# Altium PCB HearingAid.PcbDoc
Units mm, origin at the board's own origin, x right, y up, seen from the top; angles counter-clockwise.
Board outline 82.5 x 84.75 mm, 2 copper layers (Top Layer, Bottom Layer); 38 components, 20 nets, 96 pads, 2 vias.
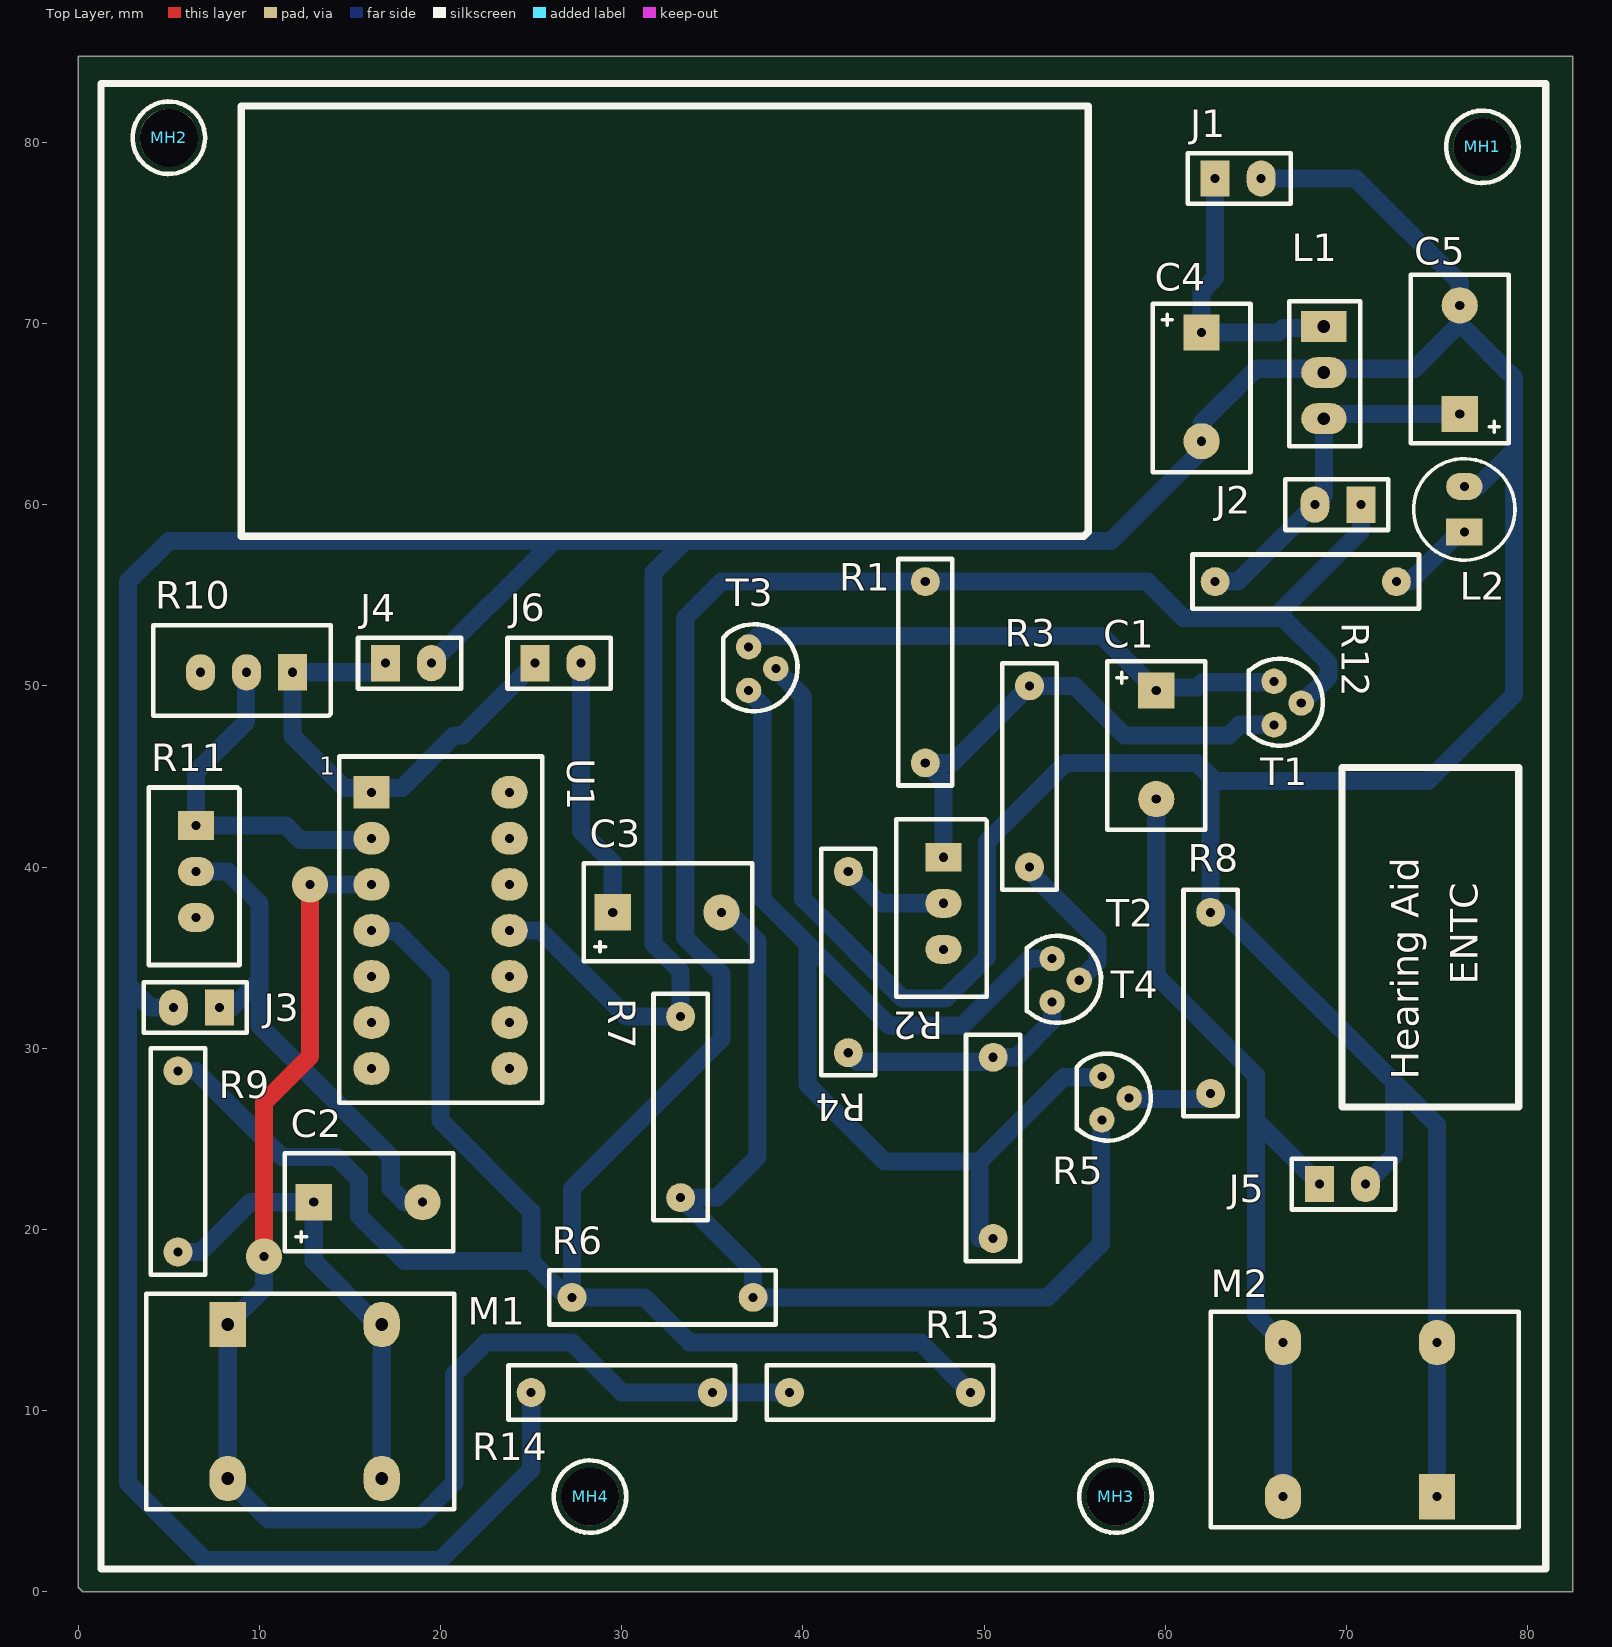
[diagram p0: Top Layer view]
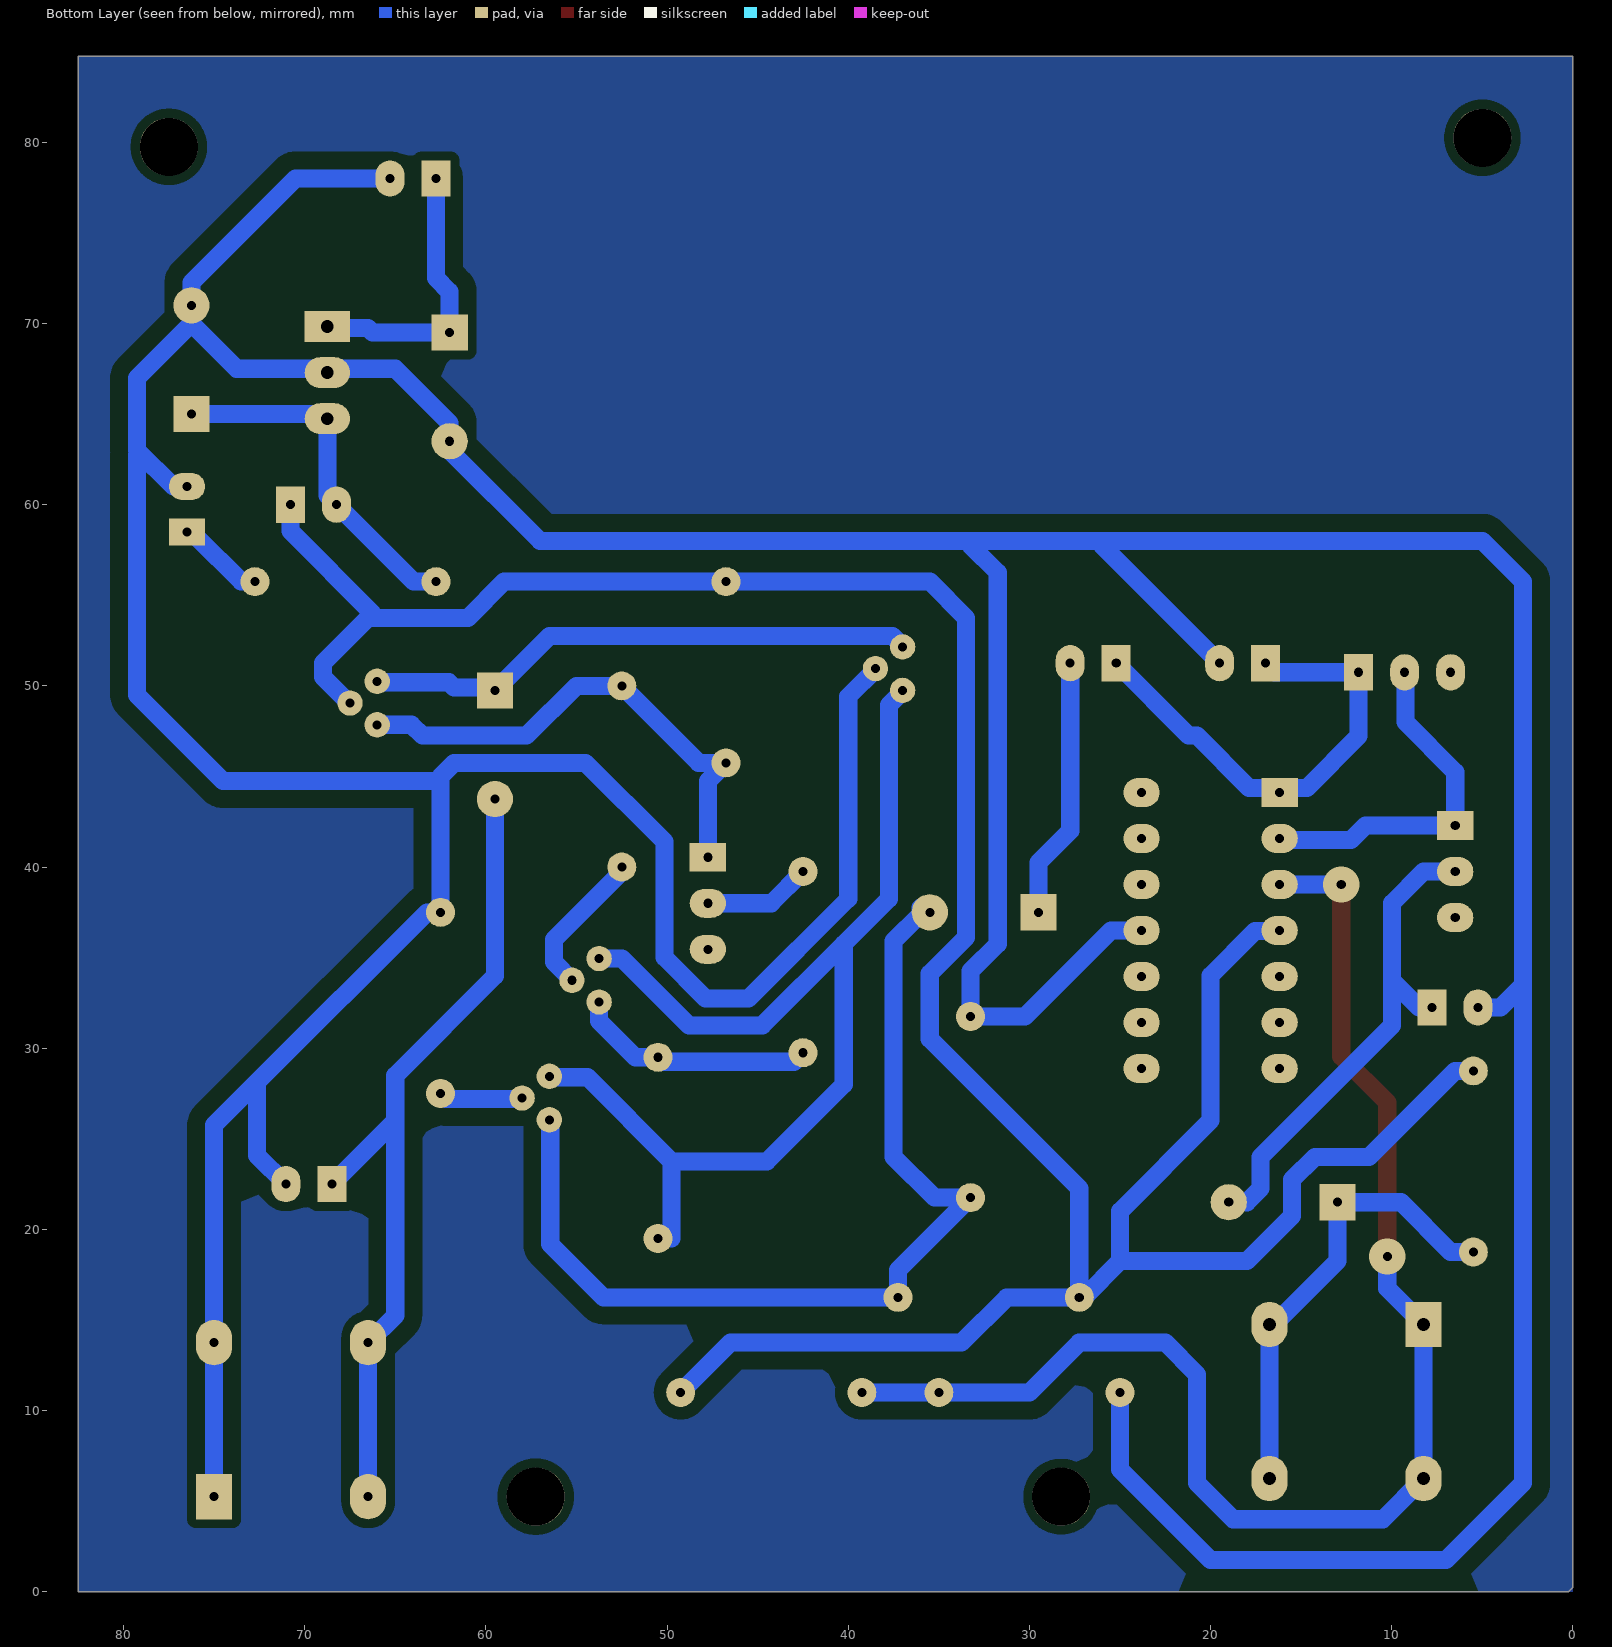
[diagram p1: Bottom Layer view, seen from below]
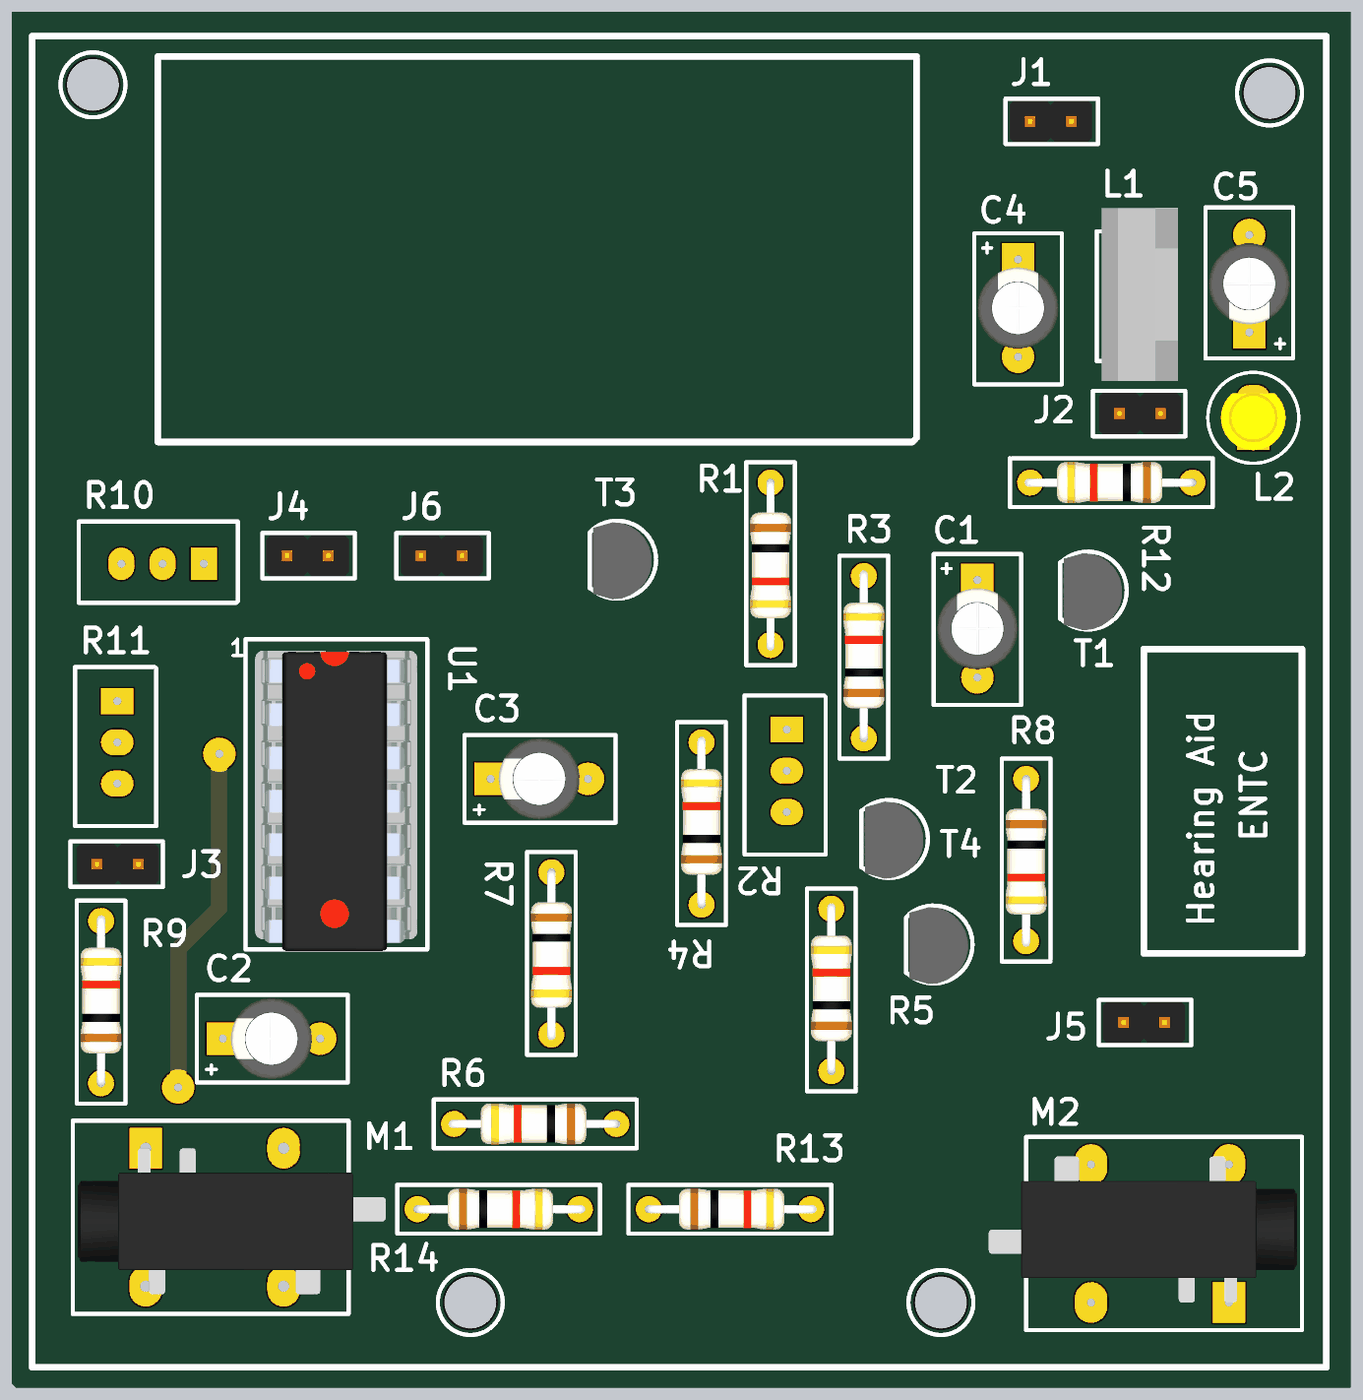
[diagram p2: 3D render of the assembled board from above, using the file's embedded part models]

## Layer stack, top to bottom
Top Solder: solder mask 0.0102, Solder Resist, Dk 3.5
Top Layer: signal copper 0.0356
Dielectric 1: dielectric 0.32, FR-4, Dk 4.8
Bottom Layer: signal copper 0.0356
Bottom Solder: solder mask 0.0102, Solder Resist, Dk 3.5

## Board outline
0,0.25 0.25,0 82.5,0 82.5,84.75 0,84.75

## Design rules (kind name [scope] priority, off if disabled: settings)
Clearance [All] p1: gap=0.5 ignorepadtopadclearanceinfootprint=FALSE except(1: Arc-Fill Arc-Poly Arc-Region Track-Fill Track-Poly Track-Region)
Height [All] p1: minheight=0 maxheight=50 prefheight=50
HoleSize [All] p1: absolutevalues=TRUE maxlimit=3.2 minlimit=0.025 maxpercent=80.000 minpercent=20.000
PlaneClearance [All] p1: clearance=1
PlaneConnect [All] p1: planeconnectstyle=Relief reliefexpansion=0.8 reliefentries=4 reliefconductorwidth=1 reliefairgap=1
PolygonConnect [All] p1: connectstyle=Relief reliefconductorwidth=1 reliefentries=4 polygonreliefangle="90 Angle" airgapwidth=1
RoutingVias [All] p1: holewidth=0.711 width=1.27 viastyle="Through Hole" minholewidth=0.711 minwidth=1.27 maxholewidth=0.711 maxwidth=1.27
ShortCircuit [All] p1 off: allowed=FALSE
SolderMaskExpansion [All] p1: expansion=0.102
Width [All] p1: maxlimit=1 minlimit=0.6 preferedwidth=0.6
25 further rules are at their usual default settings.

## Components (designator, comment, footprint, x,y, rotation, side; value= is the part's Value field where it differs from the comment)
C1 "POLYESTER_CAP_33uF" POLYESTER_CAP2 59.5,49.75 r0 top
C2 "POLYESTER_CAP_33uF" POLYESTER_CAP2 13,21.5 r90 top
C3 "0.33uF MYLAR_CAP" POLYESTER_CAP2 29.5,37.5 r90 top
C4 "0.33uF_MYLAR_CAP" POLYESTER_CAP2 62,69.5 r0 top
C5 "0.33uF_MYLAR_CAP" POLYESTER_CAP2 76.25,65 r180 top
J1 "9V_BATTERY" HEADER_MALE_2_POS 62.75,78 r90 top
J2 "5V_JUMPER" HEADER_MALE_2_POS 70.79,60 r270 top
J3 "MIC_TEST" HEADER_MALE_2_POS 7.79,32.25 r270 top
J4 "PRE_AMP_TEST" HEADER_MALE_2_POS 16.96,51.25 r90 top
J5 "POWER_AMP_TEST" HEADER_MALE_2_POS 68.5,22.5 r90 top
J6 "PRE_AMP_OUT" HEADER_MALE_2_POS 25.21,51.25 r90 top
L1 "LM7805" LM7805 68.75,69.83 r0 top
L2 "LED" LED_3MM 76.5,58.5 r0 top
M1 "CONDENSOR_MIC" CONDENSOR_MIC 8.25,14.75 r270 top
M2 "SPEAKER" SPEAKER 75,5.25 r90 top
MH1 "MOUNTING_HOLE_3mm_NON_PLATED" MOUNTING_HOLE_3MM_NONPLATED 77.5,79.75 r0 top
MH2 "MOUNTING_HOLE_3mm_NON_PLATED" MOUNTING_HOLE_3mm_NONPLATED 5,80.25 r0 top
MH3 "MOUNTING_HOLE_3mm_NON_PLATED" MOUNTING_HOLE_3mm_NONPLATED 57.25,5.25 r0 top
MH4 "MOUNTING_HOLE_3mm_NON_PLATED" MOUNTING_HOLE_3mm_NONPLATED 28.25,5.25 r0 top
R1 "1k" AXIAL_RES 46.75,50.75 r90 top
R2 "Var_Res_10K" TRIMMER_10K 47.75,40.54 r0 top
R3 "15k" AXIAL_RES 52.5,45 r270 top
R4 "2.2k" AXIAL_RES 42.5,34.75 r270 top
R5 "4.7k" AXIAL_RES 50.5,24.5 r270 top
R6 "22k" AXIAL_RES 32.25,16.25 r0 top
R7 "15k" AXIAL_RES 33.25,26.75 r90 top
R8 "1k" AXIAL_RES 62.5,32.5 r90 top
R9 "2.2k" AXIAL_RES 5.5,23.75 r270 top
R10 "Var_Res_100K" TRIMMER_10K 11.83,50.75 r270 top
R11 "Var_Res_100K" TRIMMER_10K 6.5,42.29 r0 top
R12 "330" AXIAL_RES 67.75,55.75 r0 top
R13 "1k" Axial_Res 44.25,11 r180 top
R14 "1k" Axial_Res 30,11 r180 top
T1 "BC639" BC639 66,50.25 r180 top
T2 "BC639" BC639 53.75,34.95 r180 top
T3 "BC640" BC640 37,52.15 r180 top
T4 "BC640" BC640 56.5,28.45 r180 top
U1 "LM324" LM324 20,36.5 r0 top

## Footprints (in the part's own frame and the unit in brackets; to place one, negate y for a bottom-side part, rotate by r counter-clockwise, add the part's x,y. Pads: shape width x height; smd on the part's side, far side on the other; paste and mask are expansions set on the pad)
AXIAL_RES [mm]
  round 1.6 hole 0.5: 1(-5,0) 2(5,0)
  silkscreen extent -6.25,-1.5 6.25,1.5, body extent -5.35,-1.26 5.15,1.26, height 3.14
Axial_Res [mm]
  round 1.6 hole 0.5: 1(-5,0) 2(5,0)
  silkscreen extent -6.25,-1.5 6.25,1.5, body extent -5.35,-1.26 5.15,1.26, height 3.14
BC639 [mm]
  round 1.4 hole 0.5: 1(0,0) 2(-1.5,1.2) 3(0,2.4)
  silkscreen extent -2.7,-1.25 1.4,3.55, body extent -2.43,-1.16 1.2,3.6, height 4.82
BC640 [mm]
  round 1.4 hole 0.5: 1(0,0) 2(-1.5,1.2) 3(0,2.4)
  silkscreen extent -2.7,-1.25 1.39,3.55, body extent -2.43,-1.16 1.2,3.6, height 4.82
CONDENSOR_MIC [mm]
  rect 2.5x2 hole 0.7: 1(0,0)
  oval 2.5x2 hole 0.7: 2(8.5,0) 3(8.5,8.5) 4(0,8.5)
  silkscreen extent -1.7,-4.5 10.2,12.5, body extent 0,-4.2 9,14.8, height 5.5
HEADER_MALE_2_POS [mm]
  rect 2x1.6 hole 0.5: 1(0,0)
  oval 2x1.6 hole 0.5: 2(0,-2.54)
  silkscreen extent -1.4,-4.18 1.4,1.52, body extent -1.27,-3.81 1.27,1.27, height 9.19
LED_3MM [mm]
  rect 2x1.5 hole 0.5: 1(0,0)
  oval 2x1.5 hole 0.5: 2(0,2.5)
  silkscreen extent -2.8,-1.56 2.8,4.04, body extent -2,-0.76 2,2.76, height 6.25
LM324 [mm]
  rect 2x1.8 / inner rect 2x0 / far side rect 2x1.6 hole 0.5: 1(-3.81,7.62)
  oval 2x1.8 / inner oval 2x0 / far side oval 2x1.6 hole 0.5: 2(-3.81,5.08) 3(-3.81,2.54) 4(-3.81,0) 5(-3.81,-2.54) 6(-3.81,-5.08) 7(-3.81,-7.62) 8(3.81,-7.62) 9(3.81,-5.08) 10(3.81,-2.54) 11(3.81,0) 12(3.81,2.54) 13(3.81,5.08) 14(3.81,7.62)
  silkscreen extent -5.6,-9.5 5.6,9.6, body extent -5.01,-9.59 4.99,8.9, height 8.74
LM7805 [mm]
  rect 2.5x1.7 hole 0.7: 1(0,0)
  oval 2.5x1.7 hole 0.7: 2(0,-2.54) 3(0,-5.08)
  silkscreen extent -1.9,-6.6 2,1.4, body extent -1.6,-7.84 3.1,2.84, height 27.25
MOUNTING_HOLE_3MM_NONPLATED [mm]
  round 3.2 hole 3.2 unplated: 1(0,0)
  silkscreen extent -2,-2 2,2
MOUNTING_HOLE_3mm_NONPLATED [mm]
  round 3.2 hole 3.2 unplated: 1(0,0)
  silkscreen extent -2,-2 2,2
POLYESTER_CAP2 [mm]
  rect 2x2 hole 0.5: 1(0,0)
  round 2 hole 0.5: 2(0,-6)
  silkscreen extent -2.7,-7.7 2.7,1.6, body extent -2.5,-5.5 2.5,-0.5, height 11
SPEAKER [mm]
  rect 2.5x2 hole 0.5: 1(0,0)
  oval 2.5x2 hole 0.5: 2(8.5,0) 3(8.5,8.5) 4(0,8.5)
  silkscreen extent -1.7,-4.5 10.2,12.5, body extent 0,-4.2 9,14.8, height 5.5
TRIMMER_10K [mm]
  rect 2x1.6 hole 0.5: 1(0,0)
  oval 2x1.6 hole 0.5: 2(0,-2.54) 3(0,-5.08)
  silkscreen extent -2.6,-7.7 2.4,2.1, body extent -2.53,-7.6 2.25,2.1, height 11.11

## Part data
C1 C2 C3 C4 C5: library part POLYESTER_CAP2
J1 J2 J3 J4 J5 J6: library part HEADER_MALE_2_POS
R1 R3 R4 R5 R6 R7 R8 R9 R12 R13 R14: library part Axial_Res
R2 R10 R11: library part TRIMMER_10K, "Res Cermet Trimmer 10K Ohm 10% 0.5W 25(Elec)Turn (17.27 X 6.1 X 11.68mm) Pin Panel Mount/Through Hole Tube", Manufacturer=Bourns, Manufacturer Part Number=3292W-1-103MLF, Operating Temperature="-65 to 150 °C", Power Rating="1/2 W", Resistance Value="10 KOhm", Supplier Part Number 1=652-3292W-1-103MLF, Tolerance="10 %", ComponentLink1Description=http://www.bourns.com/docs/Product-Datasheets/3292.pdf?src-supplier=Digi-Key, ComponentLink1URL=http://www.bourns.com/docs/Product-Datasheets/3292.pdf?src-supplier=Digi-Key, ComponentLink2Description=http://www.bourns.com/data/global/pdfs/3292.pdf?src-supplier=Avnet, ComponentLink2URL=http://www.bourns.com/data/global/pdfs/3292.pdf?src-supplier=Avnet, Mounting="Panel Mount/Through Hole", Number of Turns="25(Elec) Turns", Packaging="Rail / Tube", Pricing 1="1=23.15, 10=21.3, 50=15.75, 100=14.53, 1000=13.16, 10000=13.16 (USD)", Rad Hard=No, Stock 1=100, Supplier 1=Mouser, Technology=Cermet, Type=Trimmer

## Via types
v1: diameter 2, hole 0.5, Top Layer to Bottom Layer, 2 vias

## Nets (pads, with @x,y where several pads share a name; then routed paths per layer and width w, separated by ;. In a path a pad name is that pad's centre, name@x,y a point inside that pad or via, vN(x,y) a via of type N, cw(c..) or ccw(c..) an arc to the next point about the centre after c; other vN are vias at no path point)
2.5V: M1.1 M1.2 R13.2 R14.1 U1.3 | length 78.7
  Top Layer w1: v1(10.25,18.5) 10.25,27 12.79,29.54 v1(12.79,39.04)
  Bottom Layer w1: v1(10.25,18.5) 10.25,16.75 M1.1 M1.2 10.5,4 18.75,4 20.75,6 20.75,12 22.5,13.75 27.25,13.75 30,11 R14.1 R13.2 ; v1(12.79,39.04) U1.3
5V: J2.1 R1.2 R6.1 R9.1 R13.1 T1.2 U1.4 | length 165.8
  Bottom Layer w1: R9.1 6.5,28.75 11.25,24 14.25,24 15.5,22.75 15.5,20.75 18,18.25 25,18.25 ; U1.4@16.151,36.461 17.539,36.461 20,34 20,26 25,21 25,18.25 ; R13.1 46.5,13.75 33.75,13.75 31.25,16.25 R6.1 ; 66.25,53.75 61,53.75 59,55.75 35.5,55.75 33.5,53.75 33.5,36.121 35.5,34.121 35.5,30.5 27.25,22.25 R6.1 ; T1.2@67.5,49 69,50.5 69,51.25 66.25,54 70.79,58.54 J2.1 ; 25,18.25 27,16.25 R6.1
5V_JUMPER: C5.1 J2.2 L1.3 R12.1 | length 19.8
  Bottom Layer w1: R12.1 64,55.75 J2.2 68.75,60.5 L1.3 69,65 C5.1
BAT: C4.1 J1.1 L1.1 | length 16
  Bottom Layer w1: J1.1 62.75,72.5 62,71.75 C4.1 66.25,69.5 66.5,69.75 68.71,69.75 L1.1@69,70.04
GND: C4.2 C5.2 J1.2 J3.2 J4.2 J5.2 L1.2 L2.2 M2.1 M2.2 R7.2 R8.2 R14.2 T3.2 U1.11 | length 369.9
  Bottom Layer w1: J3.2 4,32.25 2.75,33.5 ; J4.2 26,57.75 ; U1.11 25.5,36.5 30.25,31.75 R7.2 33.25,34.25 31.75,35.75 31.75,56.25 33.25,57.75 ; R14.2 25,6.75 20,1.75 7,1.75 2.75,6 2.75,33.5 ; T3.2@38.45,50.95 40,49.4 40,38.25 45.5,32.75 47.879,32.75 50.15,35.021 50.15,41.4 54.5,45.75 61.75,45.75 62.5,45 62.5,44.5 ; J1.2 70.5,78 76.25,72.25 C5.2@76.25,70 ; J5.2 72.625,24.085 72.625,28.125 ; M2.1 75,25.75 72.625,28.125 ; L2.2 77.25,61 79.25,63 79.25,67 C5.2@76.25,70 ; 79.25,62.75 79.25,49.5 74.5,44.75 62.75,44.75 62.5,44.5 ; 2.75,33.5 2.75,55.75 5,58 57,58 62,63 62,64.5 65,67.5 73.75,67.5 C5.2@76.25,70 ; 62.5,44.5 R8.2 63.25,37.5 72.625,28.125
MIC: C2.2 J3.1 R11.2 | length 26.9
  Bottom Layer w1: R11.2 8.25,39.75 10,38 10,33.75 ; J3.1 8.5,32.25 10,33.75 ; 18,21.5 17.25,22.25 17.25,24 10,31.25 10,33.75
NetC1_1: C1.1 T1.1 T3.1 | length 30.7
  Bottom Layer w1: T3.1@36.95,52.15 37.55,52.75 56.5,52.75 C1.1 59.65,49.9 61.75,49.9 62.05,50.2 T1.1@66,50.2
NetC2_1: C2.1 M1.3 M1.4 R9.2 | length 25.6
  Bottom Layer w1: R9.2 6.75,18.75 9.5,21.5 C2.1 13,18.25 16.5,14.75 M1.4 M1.3
NetC3_2: C3.2 R6.2 R7.1 T4.3 | length 53.9
  Bottom Layer w1: C3.2@36,37.75 36,37.409 37.5,35.909 37.5,24 35.25,21.75 R7.1 37.25,17.75 R6.2 53.5,16.25 56.45,19.2 T4.3@56.45,26
NetL2_1: L2.1 R12.2 | length 4.3
  Bottom Layer w1: R12.2 73.5,55.75 L2.1@76,58.25
NetR1_1: R1.1 R2.1 R3.1 T1.3 | length 28
  Bottom Layer w1: R2.1 47.75,44.75 R1.1 48.25,45.75 R3.1 55,50 57.75,47.25 63.5,47.25 64.1,47.85 T1.3
NetR2_2: R2.2 R4.1 | length 6
  Bottom Layer w1: R4.1 44.25,38 R2.2
NetR3_2: R3.2 T2.2 | length 8.2
  Bottom Layer w1: R3.2 52.5,39.75 56.25,36 56.25,34.75 T2.2
NetR4_2: R4.2 R5.1 T2.3 | length 13.4
  Bottom Layer w1: R4.2 43,29.25 50.25,29.25 R5.1 51.75,29.5 53.75,31.5 T2.3
NetR5_2: R5.2 T2.1 T3.3 T4.1 | length 64.1
  Bottom Layer w1: T3.3@36.95,49.75 37.75,48.95 37.75,38.25 40.25,35.75 ; R5.2@49.75,19.5 49.75,23.75 ; T2.1 52.5,34.95 48.8,31.25 44.75,31.25 40.25,35.75 ; T4.1@56.45,28.4 54.4,28.4 49.75,23.75 ; 40.25,35.75 40.25,28 44.5,23.75 49.75,23.75
NetR8_1: R8.1 T4.2 | length 4.7
  Bottom Layer w1: T4.2@57.95,27.2 62.2,27.2 R8.1
NetR10_2: R10.2 R11.1 U1.2 | length 19.6
  Bottom Layer w1: R10.2 9.25,50.71 9.25,48 6.5,45.25 R11.1 11.46,42.29 12.25,41.5 U1.2@16.19,41.5
POWER_AMP_OUT: C1.2 J5.1 M2.3 M2.4 | length 46.2
  Bottom Layer w1: C1.2 59.5,34 65,28.5 65,25.75 ; M2.4 M2.3 65,15.25 65,25.75 ; J5.1 65.25,25.75 65,25.75
PRE_AMP_OUT: J4.1 J6.1 R10.1 U1.1 | length 26.3
  Bottom Layer w1: J4.1 16.46,50.75 R10.1 11.83,47.23 14.69,44.37 17.87,44.37 20.75,47.25 21.21,47.25 J6.1
PRE_AMP_OUT_2: C3.1 J6.2 | length 14.5
  Bottom Layer w1: J6.2 27.75,42 29.5,40.25 C3.1
pads on no net: MH1.1 MH2.1 MH3.1 MH4.1 R2.3 R10.3 R11.3 U1.5 U1.6 U1.7 U1.8 U1.9 U1.10 U1.12 U1.13 U1.14

## Polygon pours and split planes (outlines as drawn)
no net on Bottom Layer "NONET_L02_P002" (solid, pour order 2): 0,0 0,84.75 82.5,84.75 82.5,0

## Silkscreen, mask and mechanical layers (free items; w line width, h text height)
Top Overlay:
  lines w0.4: 1.25,1.25 81,1.25 81,83.25 1.25,83.25 1.25,1.25 ; 9,58.25 55.5,58.25 55.75,58.5 55.75,82 9,82 9,58.25 ; 69.75,26.75 69.75,45.5 79.5,45.5 79.5,26.75 69.75,26.75
  text "ENTC" at 77.25,33.5 h1.52 r90
  text "Hearing Aid" at 74,28.25 h1.52 r90
Mechanical 9:
  lines w0.4: 0,0 0,84.75 82.5,84.75 82.5,0 0,0

## Text inside footprints (layer, text, board x,y; h text height)
U1: Top Overlay "1" at 13.3,45.1 h1